# Altium PCB PLL_PCB.PcbDoc (part 1 of 3)
Units mil, origin at the board's own origin, x right, y up, seen from the top; angles counter-clockwise.
Board outline 5844 x 4441 mil, 4 copper layers (Top Layer, GND Layer, Power Layer, Bottom Layer), stack 22.156 mil thick; 143 components, 61 nets, 427 pads, 2616 vias.
Unrouted connection lines stored in the file: 5.
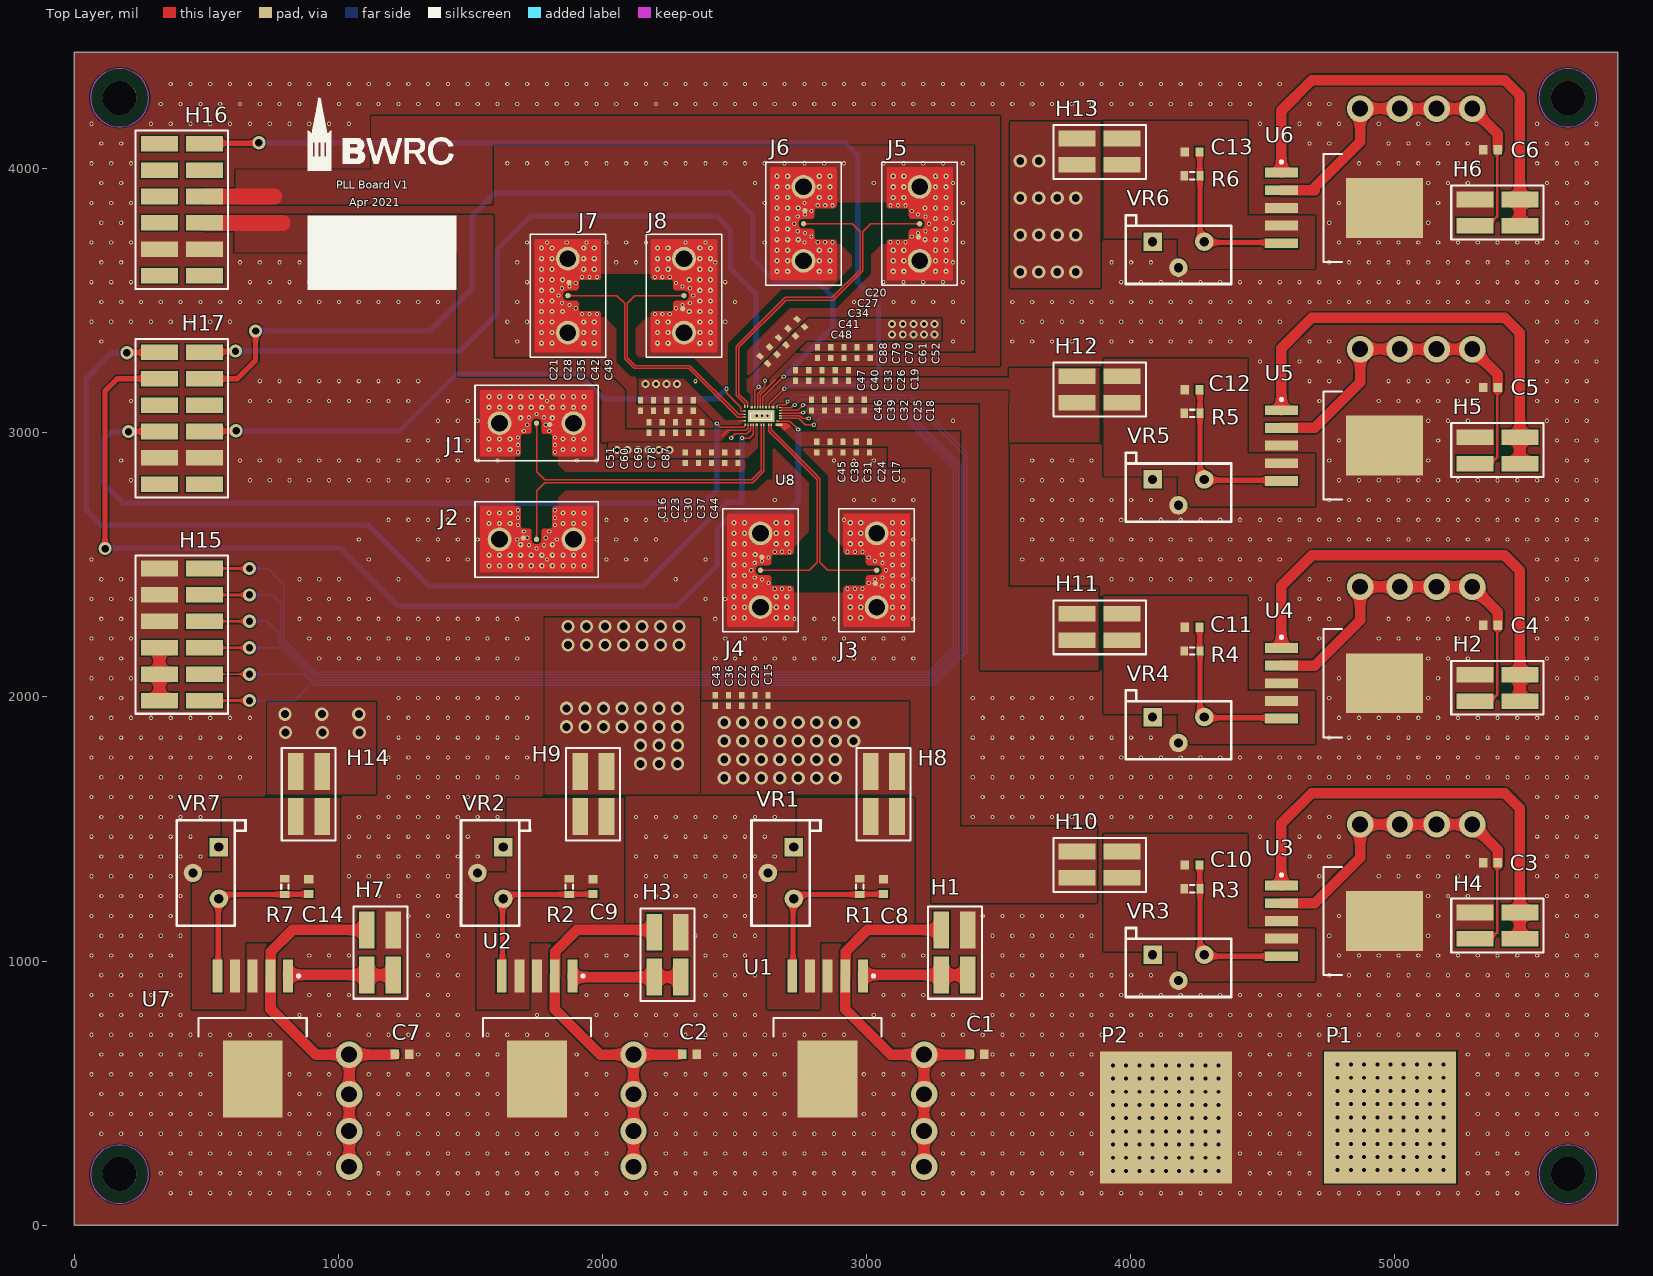
[diagram p0: Top Layer view]
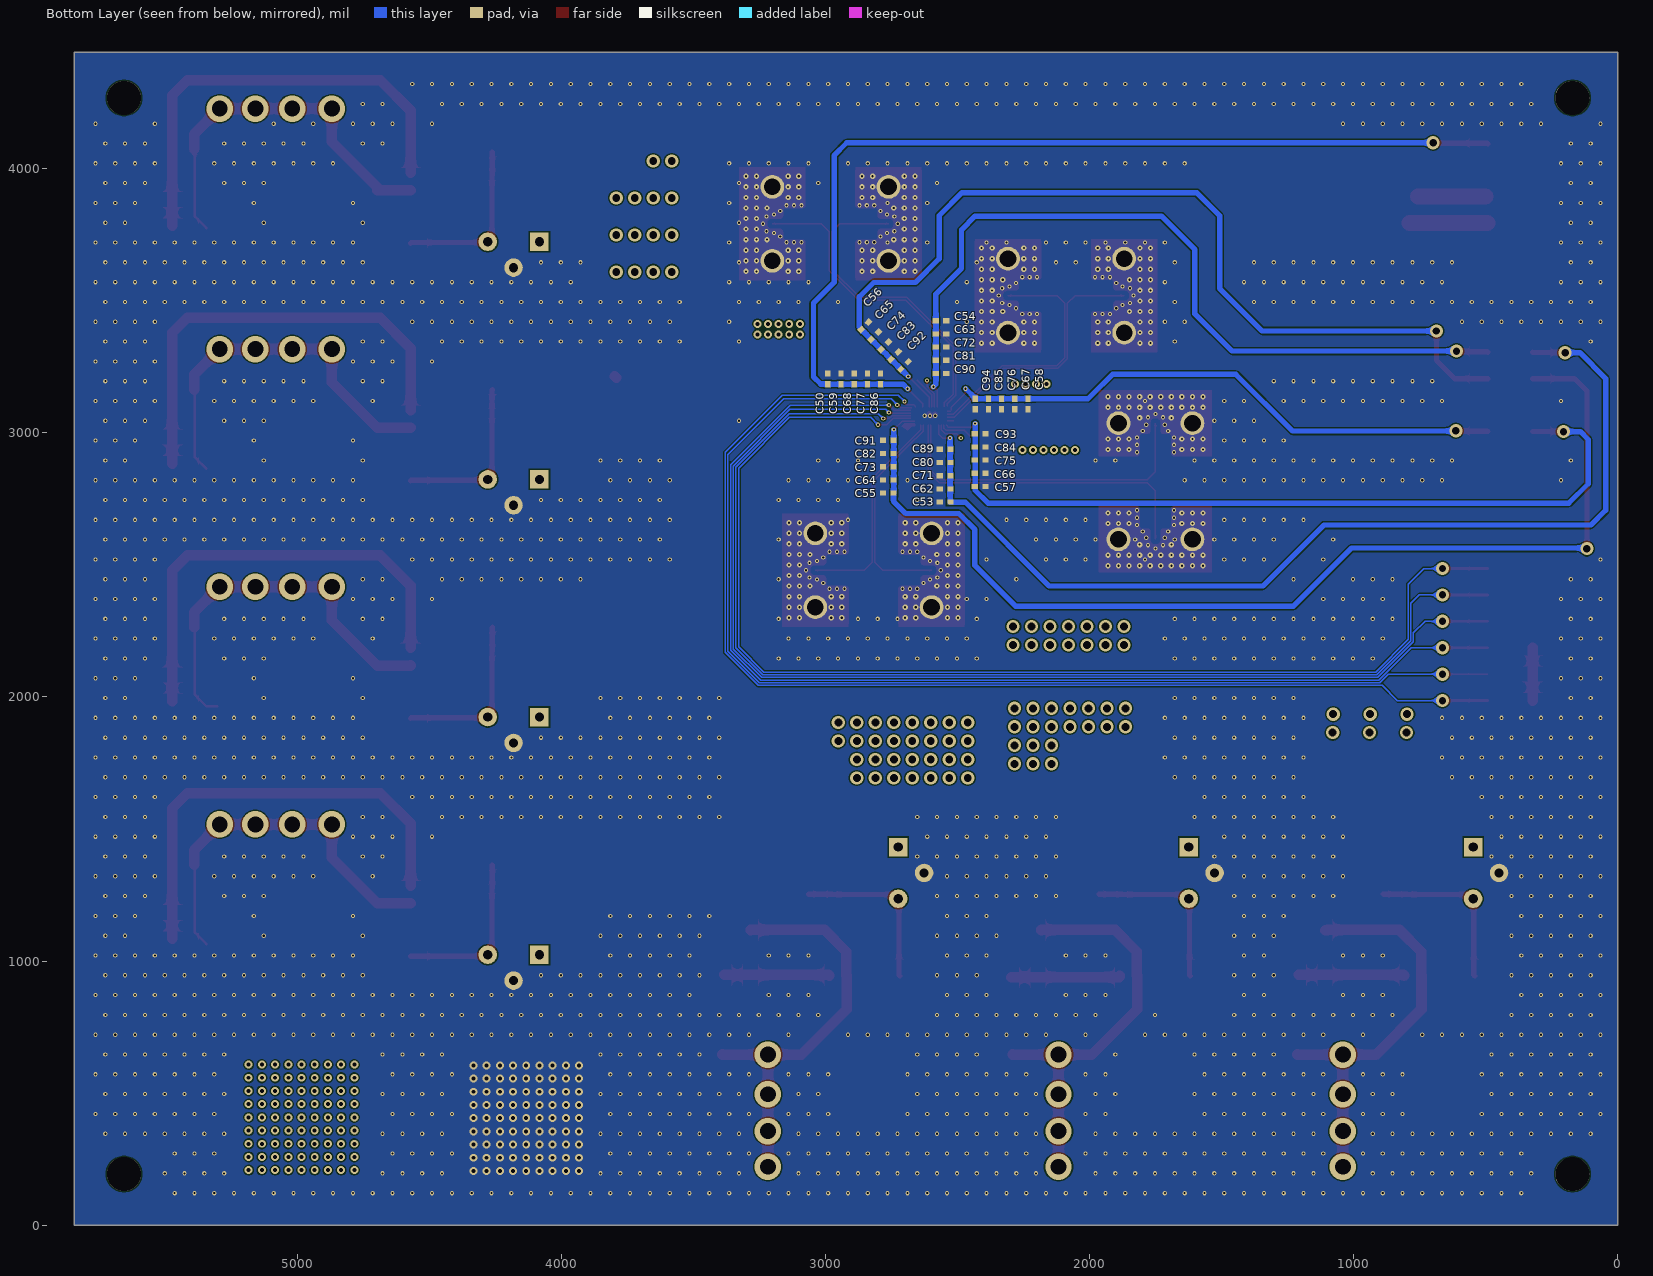
[diagram p1: Bottom Layer view, seen from below]
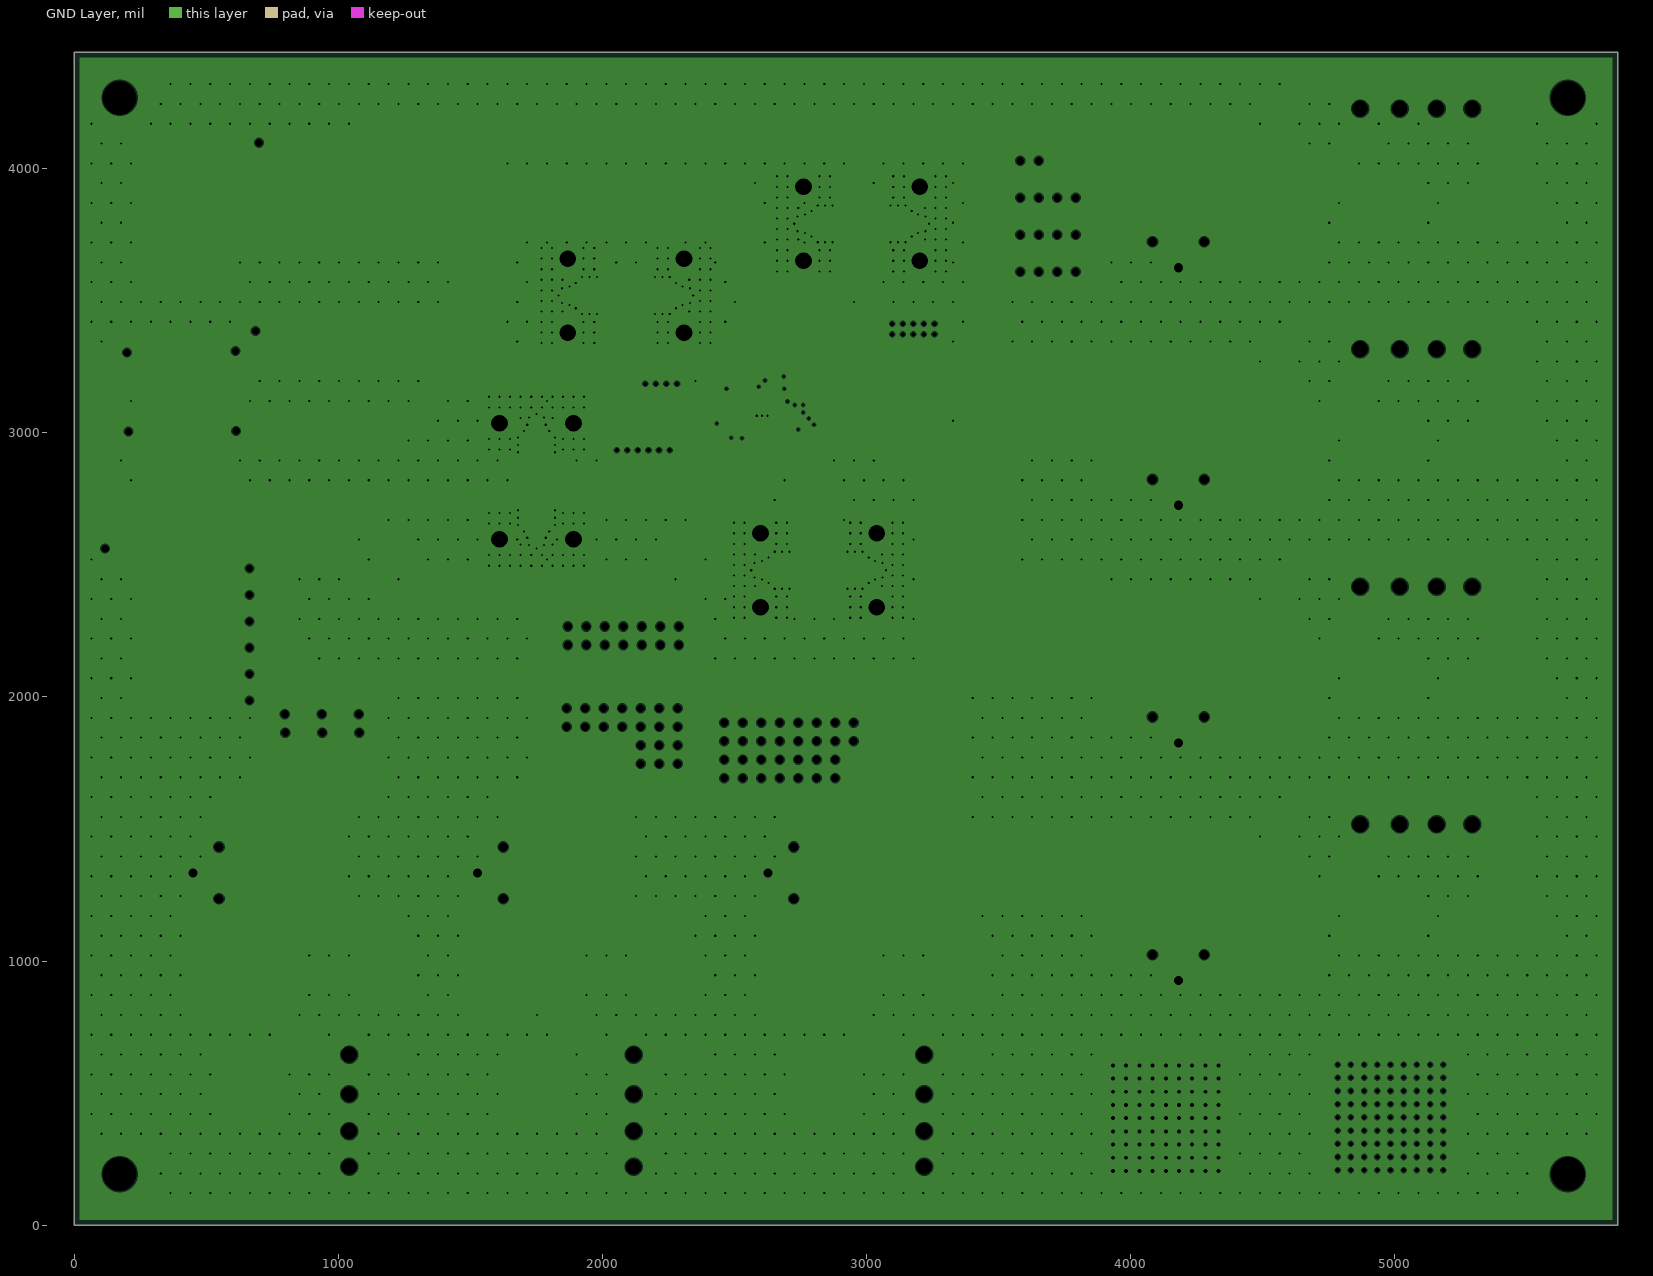
[diagram p2: GND Layer, clearances drawn from the general rule]
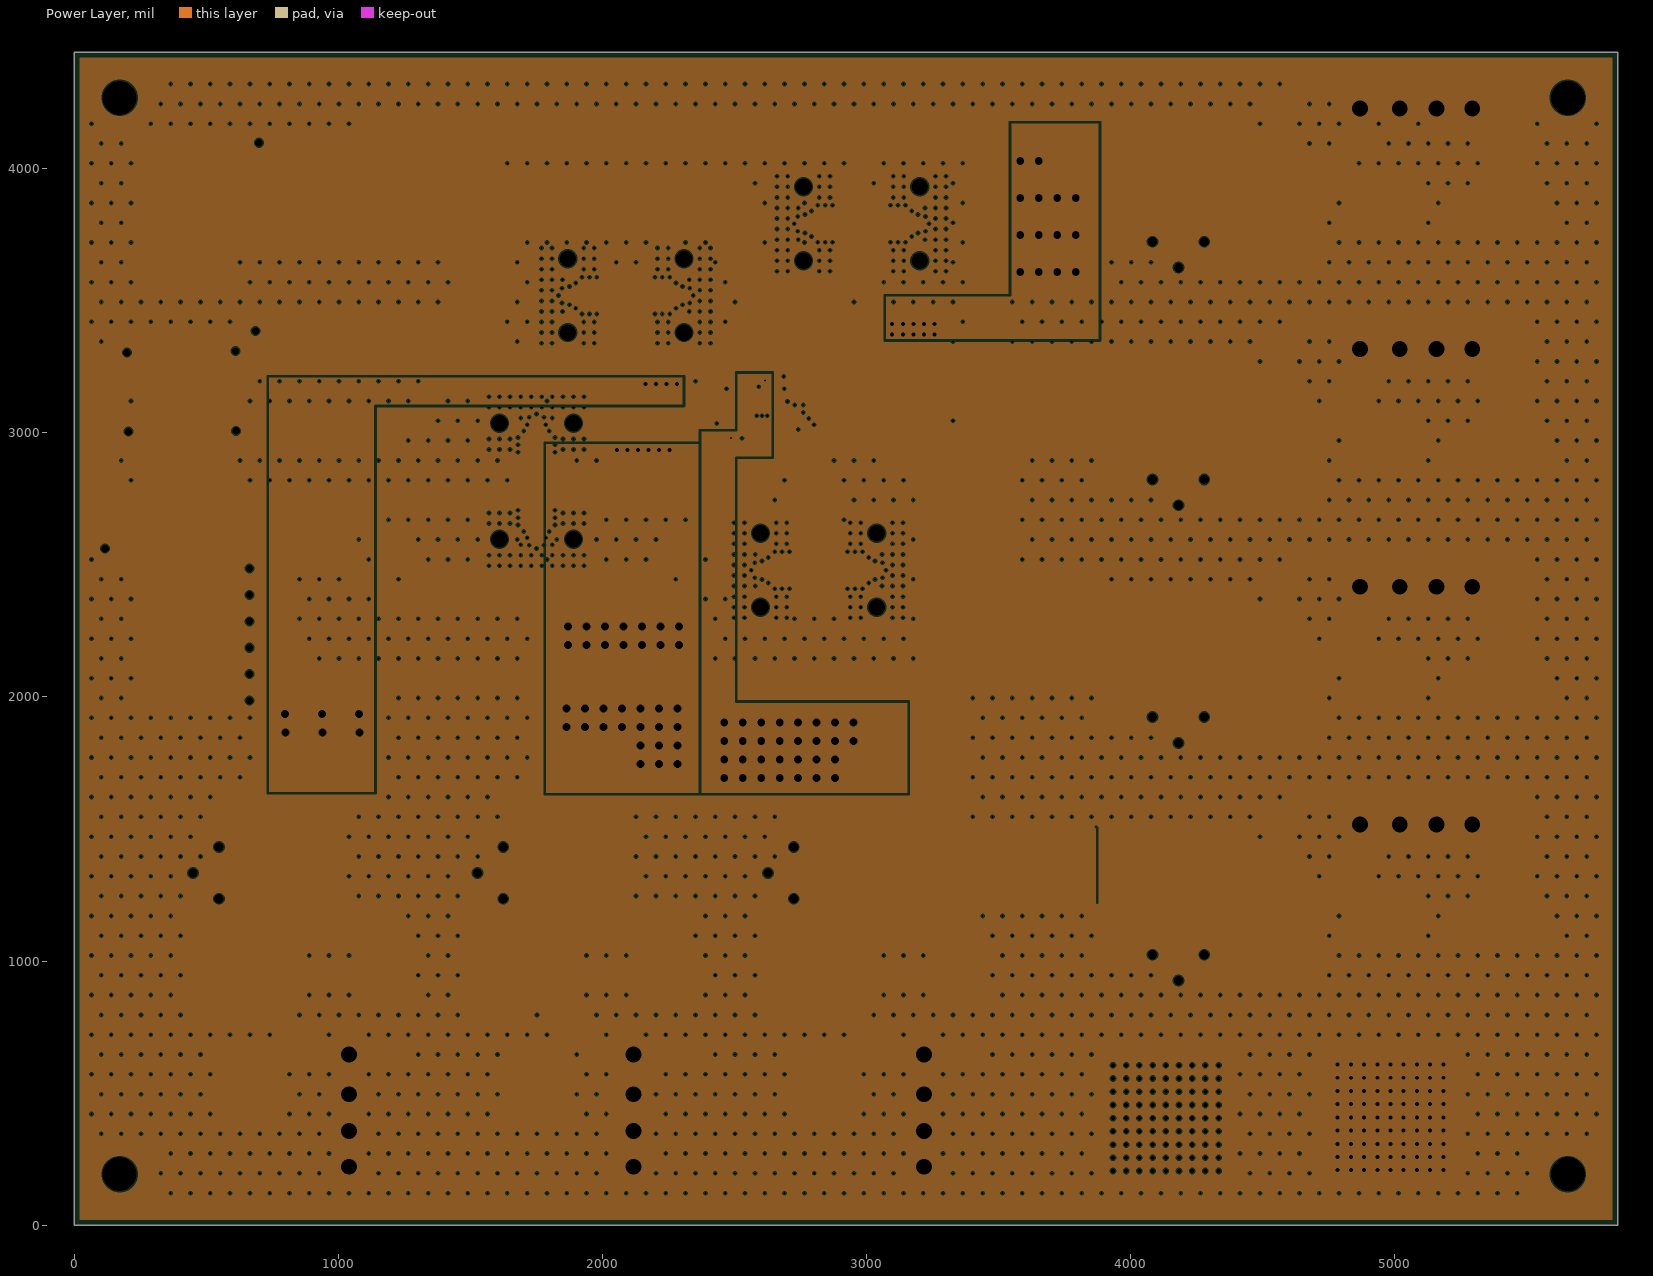
[diagram p3: Power Layer, clearances drawn from the general rule]

## Layer stack, top to bottom
Top Solder: solder mask 0.4, Solder Resist, Dk 3.5
Top Layer: signal copper 1.4
Dielectric 2: prepreg 2, PP-001, Dk 3.9
GND Layer: plane copper 1.378, net GND
Dielectric 1: dielectric 12.6, FR-4, Dk 4.8
Power Layer: plane copper 1.378, net (Multiple Nets)
Dielectric 3: prepreg 2, PP-001, Dk 3.9
Bottom Layer: signal copper 1.4
Bottom Solder: solder mask 0.4, Solder Resist, Dk 3.5

## Board outline
0,0 5844,0 5844,4441 0,4441

## Design rules (kind name [scope] priority, off if disabled: settings)
Clearance [All] p1: gap=5 ignorepadtopadclearanceinfootprint=FALSE
DiffPairsRouting [All] p1: maxlimit=10 minlimit=5 mostfreqgap=5 toplayer_minwidth=5 toplayer_maxwidth=15 toplayer_prefwidth=5 bottomlayer_minwidth=5 bottomlayer_maxwidth=15 bottomlayer_prefwidth=5 maxuncoupledlength=500
HoleSize [All] p1: absolutevalues=TRUE maxlimit=200 minlimit=8 maxpercent=80.000 minpercent=20.000
MinimumSolderMaskSliver [All] p1: minsoldermaskwidth=4
PlaneClearance [All] p1: clearance=5
PlaneConnect [All] p1: planeconnectstyle=Direct reliefexpansion=20 reliefentries=4 reliefconductorwidth=10 reliefairgap=10
PolygonConnect [All] p1: connectstyle=Direct reliefconductorwidth=10 reliefentries=4 polygonreliefangle="90 Angle" airgapwidth=10
RoutingVias [All] p1: holewidth=28 width=50 viastyle="Through Hole" minholewidth=8 minwidth=16 maxholewidth=150 maxwidth=300
SilkToSilkClearance [All] p1: silktosilkclearance=0
SilkToSolderMaskClearance [IsPad] p1: minsilkscreentomaskgap=0 clearancetoexposedcopper=TRUE
SolderMaskExpansion [All] p1: expansion=4 istentingtop=FALSE
Width [All] p1: maxlimit=60 minlimit=5 preferedwidth=20 minimp=50.000000 maximp=50.000000 favimp=50.000000
23 further rules are at their usual default settings.

## Classes and differential pairs
differential pair REF_CK: +REF_CK_P -REF_CK_N
differential pair REF2_CK: +REF2_CK_P -REF2_CK_N
differential pair PLL_CK: +PLL_CK_P -PLL_CK_N
differential pair PLL2_CK: +PLL2_CK_P -PLL2_CK_N

## Components (designator, comment, footprint, x,y, rotation, side; value= is the part's Value field where it differs from the comment)
C1 "Cap Semi" 1608[0603] 3418.28,647 r180 top value=10uF
C2 "Cap Semi" 1608[0603] 2329.64,647 r180 top value=10uF
C3 "Cap Semi" 1608[0603] 5362.34,1372 r0 top value=10uF
C4 "Cap Semi" 1608[0603] 5362.34,2272 r0 top value=10uF
C5 "Cap Semi" 1608[0603] 5362.34,3172 r0 top value=10uF
C6 "Cap Semi" 1608[0603] 5362.34,4072 r0 top value=10uF
C7 "Cap Semi" 1608[0603] 1241,647 r180 top value=10uF
C8 "Cap Semi" 1608[0603] 3064.28,1281.75 r90 top value=3.3nF
C9 "Cap Semi" 1608[0603] 1964,1281.75 r90 top value=3.3nF
C10 "Cap Semi" 1608[0603] 4232.9,1364 r180 top value=3.3nF
C11 "Cap Semi" 1608[0603] 4232.9,2264 r180 top value=3.3nF
C12 "Cap Semi" 1608[0603] 4232.9,3164 r180 top value=3.3nF
C13 "Cap Semi" 1608[0603] 4232.9,4064 r180 top value=3.3nF
C14 "Cap Semi" 1608[0603] 887,1281.75 r90 top value=3.3nF
C15 "Cap Semi" 0402 2627.05,1986.5 r270 top value=10uF
C16 "Cap Semi" 0402 2313.01,2906.31 r90 top value=10uF
C17 "Cap Semi" 0402 3011.01,2946.31 r90 top value=10uF
C18 "Cap Semi" 0402 2991.01,3105.31 r90 top value=10uF
C19 "Cap Semi" 0402 2931.17,3217.67 r270 top value=10uF
C20 "Cap Semi" 0402 2751.15,3416.45 r315 top value=10uF
C21 "Cap Semi" 0402 2143.33,3103.86 r90 top value=10uF
C22 "Cap Semi" 0402 2527.05,1986.5 r270 top value=1uF
C23 "Cap Semi" 0402 2363.01,2906.31 r90 top value=1uF
C24 "Cap Semi" 0402 2961.01,2946.31 r90 top value=1uF
C25 "Cap Semi" 0402 2941.01,3105.31 r90 top value=1uF
C26 "Cap Semi" 0402 2881.17,3217.67 r270 top value=1uF
C27 "Cap Semi" 0402 2716.15,3381.45 r315 top value=1uF
C28 "Cap Semi" 0402 2193.33,3103.86 r90 top value=1uF
C29 "Cap Semi" 0402 2577.05,1986.5 r270 top value=100nF
C30 "Cap Semi" 0402 2413.01,2906.31 r90 top value=100nF
C31 "Cap Semi" 0402 2911.01,2946.31 r90 top value=100nF
C32 "Cap Semi" 0402 2891.01,3105.31 r90 top value=100nF
C33 "Cap Semi" 0402 2831.17,3217.67 r270 top value=100nF
C34 "Cap Semi" 0402 2681.15,3346.45 r315 top value=100nF
C35 "Cap Semi" 0402 2243.33,3103.86 r90 top value=100nF
C36 "Cap Semi" 0402 2477.05,1986.5 r270 top value=10nF
C37 "Cap Semi" 0402 2463.01,2906.31 r90 top value=10nF
C38 "Cap Semi" 0402 2861.01,2946.31 r90 top value=10nF
C39 "Cap Semi" 0402 2841.01,3105.31 r90 top value=10nF
C40 "Cap Semi" 0402 2781.17,3217.67 r270 top value=10nF
C41 "Cap Semi" 0402 2646.15,3311.45 r315 top value=10nF
C42 "Cap Semi" 0402 2293.33,3103.86 r90 top value=10nF
C43 "Cap Semi" 0402 2427.05,1986.5 r270 top value=1nF
C44 "Cap Semi" 0402 2513.01,2906.31 r90 top value=1nF
C45 "Cap Semi" 0402 2811.01,2946.31 r90 top value=1nF
C46 "Cap Semi" 0402 2791.01,3105.31 r90 top value=1nF
C47 "Cap Semi" 0402 2731.17,3217.67 r270 top value=1nF
C48 "Cap Semi" 0402 2611.15,3276.45 r315 top value=1nF
C49 "Cap Semi" 0402 2343.33,3103.86 r90 top value=1nF
C50 "Cap Semi" 0402 2991,3204.69 r270 bottom value=10uF
C51 "Cap Semi" 0402 2176.35,3020.29 r270 top value=10uF
C52 "Cap Semi" 0402 3014.2,3304.27 r270 top value=10uF
C53 "Cap Semi" 0402 2546.69,2738 r180 bottom value=10uF
C54 "Cap Semi" 0402 2562,3425 r0 bottom value=10uF
C55 "Cap Semi" 0402 2761.69,2772 r180 bottom value=10uF
C56 "Cap Semi" 0402 2850.53,3405.39 r315 bottom value=10uF
C57 "Cap Semi" 0402 2414,2797 r0 bottom value=10uF
C58 "Cap Semi" 0402 2232.58,3109.87 r90 bottom value=10uF
C59 "Cap Semi" 0402 2941,3204.69 r270 bottom value=1uF
C60 "Cap Semi" 0402 2226.35,3020.29 r270 top value=1uF
C61 "Cap Semi" 0402 2964.2,3304.27 r270 top value=1uF
C62 "Cap Semi" 0402 2546.69,2788 r180 bottom value=1uF
C63 "Cap Semi" 0402 2562,3375 r0 bottom value=1uF
C64 "Cap Semi" 0402 2761.69,2822 r180 bottom value=1uF
C65 "Cap Semi" 0402 2813.03,3367.89 r315 bottom value=1uF
C66 "Cap Semi" 0402 2414,2847 r0 bottom value=1uF
C67 "Cap Semi" 0402 2282.58,3109.87 r90 bottom value=1uF
C68 "Cap Semi" 0402 2891,3204.69 r270 bottom value=100nF
C69 "Cap Semi" 0402 2276.35,3020.29 r270 top value=100nF
C70 "Cap Semi" 0402 2914.2,3304.27 r270 top value=100nF
C71 "Cap Semi" 0402 2546.69,2838 r180 bottom value=100nF
C72 "Cap Semi" 0402 2562,3325 r0 bottom value=100nF
C73 "Cap Semi" 0402 2761.69,2872 r180 bottom value=100nF
C74 "Cap Semi" 0402 2775.53,3330.39 r315 bottom value=100nF
C75 "Cap Semi" 0402 2414,2897 r0 bottom value=100nF
C76 "Cap Semi" 0402 2332.58,3109.87 r90 bottom value=100nF
C77 "Cap Semi" 0402 2841,3204.69 r270 bottom value=10nF
C78 "Cap Semi" 0402 2326.35,3020.29 r270 top value=10nF
C79 "Cap Semi" 0402 2864.2,3304.27 r270 top value=10nF
C80 "Cap Semi" 0402 2546.69,2888 r180 bottom value=10nF
C81 "Cap Semi" 0402 2562,3275 r0 bottom value=10nF
C82 "Cap Semi" 0402 2761.69,2922 r180 bottom value=10nF
C83 "Cap Semi" 0402 2738.03,3292.89 r315 bottom value=10nF
C84 "Cap Semi" 0402 2414,2947 r0 bottom value=10nF
C85 "Cap Semi" 0402 2382.58,3109.87 r90 bottom value=10nF
C86 "Cap Semi" 0402 2791,3204.69 r270 bottom value=1nF
C87 "Cap Semi" 0402 2376.35,3020.29 r270 top value=1nF
C88 "Cap Semi" 0402 2814.2,3304.27 r270 top value=1nF
C89 "Cap Semi" 0402 2546.69,2938 r180 bottom value=1nF
C90 "Cap Semi" 0402 2562,3225 r0 bottom value=1nF
C91 "Cap Semi" 0402 2761.69,2972 r180 bottom value=1nF
C92 "Cap Semi" 0402 2700.53,3255.39 r315 bottom value=1nF
C93 "Cap Semi" 0402 2414,2997 r0 bottom value=1nF
C94 "Cap Semi" 0402 2432.58,3109.87 r90 bottom value=1nF
H1 "HEADER_2X2_SMT" HEADER_2X2_SMT 3333.28,1032.31 r270 top
H2 "HEADER_2X2_SMT" HEADER_2X2_SMT 5389,2034 r0 top
H3 "HEADER_2X2_SMT" HEADER_2X2_SMT 2245.47,1024 r270 top
H4 "HEADER_2X2_SMT" HEADER_2X2_SMT 5389,1134 r0 top
H5 "HEADER_2X2_SMT" HEADER_2X2_SMT 5389,2934 r0 top
H6 "HEADER_2X2_SMT" HEADER_2X2_SMT 5389,3834 r0 top
H7 "HEADER_2X2_SMT" HEADER_2X2_SMT 1157.67,1032.31 r270 top
H8 "HEADER_2X2_SMT" HEADER_2X2_SMT 3065.28,1632.31 r90 top
H9 "HEADER_2X2_SMT" HEADER_2X2_SMT 1965,1632.31 r90 top
H10 "HEADER_2X2_SMT" HEADER_2X2_SMT 3882.35,1365 r180 top
H11 "HEADER_2X2_SMT" HEADER_2X2_SMT 3882.34,2265 r180 top
H12 "HEADER_2X2_SMT" HEADER_2X2_SMT 3882.34,3165 r180 top
H13 "HEADER_2X2_SMT" HEADER_2X2_SMT 3882.34,4065 r180 top
H14 "HEADER_2X2_SMT" HEADER_2X2_SMT 888,1632.31 r90 top
H15 "HEADER_2X6_SMT" HDR2X6_SMT 407,2236.47 r0 top
H16 "HEADER_2X6_SMT" HDR2X6_SMT 407,3845.55 r0 top
H17 "HEADER_2X6_SMT" HDR2X6_SMT 407,3055.55 r0 top
J1 "CON_K_SMT_2d92" CON_K_SMT_2D92 1750,3037 r270 top
J2 "CON_K_SMT_2d92" CON_K_SMT_2D92 1750,2597 r90 top
J3 "CON_K_SMT_2d92" CON_K_SMT_2D92 3038.01,2480 r180 top
J4 "CON_K_SMT_2d92" CON_K_SMT_2D92 2598.01,2480 r0 top
J5 "CON_K_SMT_2d92" CON_K_SMT_2D92 3201,3792 r180 top
J6 "CON_K_SMT_2d92" CON_K_SMT_2D92 2761,3792 r0 top
J7 "CON_K_SMT_2d92" CON_K_SMT_2D92 1868.5,3520 r0 top
J8 "CON_K_SMT_2d92" CON_K_SMT_2D92 2308.5,3520 r180 top
P1 "BANANA_JACK_SMT" BANANA_JACK_SMT 4983,407 r0 top
P2 "BANANA_JACK_SMT" BANANA_JACK_SMT 4133,407 r0 top
R1 "Res3" J1-0603 2974.28,1281.75 r90 top value=1.4K
R2 "Res3" J1-0603 1874,1281.75 r90 top value=1.4K
R3 "Res3" J1-0603 4232.9,1274 r180 top value=1.4K
R4 "Res3" J1-0603 4232.9,2174 r180 top value=1.4K
R5 "Res3" J1-0603 4232.9,3074 r180 top value=1.4K
R6 "Res3" J1-0603 4232.9,3974 r180 top value=1.4K
R7 "Res3" J1-0603 797,1281.75 r90 top value=1.4K
U1 "LP38511TJ-ADJ" TJ5A_N 2852.28,707.31 r270 top
U2 "LP38511TJ-ADJ" TJ5A_N 1752,707.31 r270 top
U3 "LP38511TJ-ADJ" TJ5A_N 4807.34,1152 r0 top
U4 "LP38511TJ-ADJ" TJ5A_N 4807.34,2052 r0 top
U5 "LP38511TJ-ADJ" TJ5A_N 4807.34,2952 r0 top
U6 "LP38511TJ-ADJ" TJ5A_N 4807.34,3852 r0 top
U7 "LP38511TJ-ADJ" TJ5A_N 675,707.31 r270 top
U8 "PLL_CHIP" PLL_CHIP 2601.01,3064.04 r0 top
VR1 "5K" PV36 2724.28,1333.75 r180 top
VR2 "5K" PV36 1624,1333.75 r180 top
VR3 "5K" PV36 4180.9,1024 r270 top
VR4 "5K" PV36 4180.9,1924 r270 top
VR5 "5K" PV36 4180.9,2824 r270 top
VR6 "5K" PV36 4180.9,3724 r270 top
VR7 "5K" PV36 547,1333.75 r180 top

## Footprints (in the part's own frame and the unit in brackets; to place one, negate y for a bottom-side part, rotate by r counter-clockwise, add the part's x,y. Pads: shape width x height; smd on the part's side, far side on the other; paste and mask are expansions set on the pad)
0402 [mm] "Chip Capacitor, Body 1.0x0.5mm, IPC High Density"
  rect 0.6x0.5 smd: 1(-0.508,0) 2(0.508,0)
  body extent -0.55,-0.3 0.55,0.3, height 1.3
1608[0603] [mm] "Chip Capacitor, Body 1.6x0.8mm, IPC High Density"
  rect 0.8x0.9 smd: 1(-0.7,0) 2(0.7,0)
  body extent -0.87,-0.48 0.87,0.48, height 1.3
BANANA_JACK_SMT [mil]
  rect 500x500 smd: 1(0,0)
CON_K_SMT_2D92 [mil]
  round 90 hole 63: 1(0,140) 4(0,-140)
  round 19.68 smd paste-9.84 mask+9.84: 2(5,50)
  round 20 smd paste-10: 3(0,0)
  Top Layer region: -125.51,-215 125.51,-215 125.51,-195 -125.51,-195
  Top Layer region: -125.51,195 125.51,195 125.51,215 -125.51,215
  Top Layer region: -125.51,-205 -125.46,-205.22 -125.32,-205.4 -125.11,-205.5 -124.89,-205.5 -124.68,-205.4 -124.54,-205.22 -124.49,-205 -124.49,-205 -124.49,-0.51 -20.51,-0.51 -17.59,-10.55 -10.11,-17.85 0,-20.51 0,-20.51 0.2,-20.48 0.36,-20.36 0.48,-20.2 0.51,-20 0.51,-20 0.48,-19.8 0.36,-19.64 0.2,-19.52 0,-19.49 0,-19.49 -7.46,-18 -13.78,-13.78 -18,-7.46 -19.49,0 -19.49,0 -18,7.46 -13.78,13.78 -7.46,18 0,19.49 0,19.49 30,19.49 34.02,20.29 37.44,22.56 39.71,25.98 40.51,30 40.51,30 40.51,50 41.24,53.63 43.29,56.71 46.37,58.76 50,59.49 50,59.49 115,59.49 119.02,60.29 122.44,62.56 124.71,65.98 125.51,70 125.51,70 125.51,205 125.48,205.2 125.36,205.36 125.2,205.48 125,205.51 125,205.51 -125,205.51 -125.2,205.48 -125.36,205.36 -125.48,205.2 -125.51,205 -125.51,205
  Top Layer region: -125,-205.51 -125.2,-205.48 -125.36,-205.36 -125.48,-205.2 -125.51,-205 -125.51,-205 -125.51,205 -125.46,205.22 -125.32,205.4 -125.11,205.5 -124.89,205.5 -124.68,205.4 -124.54,205.22 -124.49,205 -124.49,205 -124.49,0.51 -20.51,0.51 -17.59,10.55 -10.11,17.85 0,20.51 0,20.51 0.2,20.48 0.36,20.36 0.48,20.2 0.51,20 0.51,20 0.48,19.8 0.36,19.64 0.2,19.52 0,19.49 0,19.49 -7.46,18 -13.78,13.78 -18,7.46 -19.49,0 -19.49,0 -18,-7.46 -13.78,-13.78 -7.46,-18 0,-19.49 0,-19.49 30,-19.49 34.02,-20.29 37.44,-22.56 39.71,-25.98 40.51,-30 40.51,-30 40.49,-30.15 40.43,-30.29 40.43,-30.29 40.49,-30.42 40.51,-30.58 40.51,-30.58 40.51,-50 41.24,-53.63 43.29,-56.71 46.37,-58.76 50,-59.49 50,-59.49 115,-59.49 119.02,-60.29 122.44,-62.56 124.71,-65.98 125.51,-70 125.51,-70 125.51,-205 125.48,-205.2 125.36,-205.36 125.2,-205.48 125,-205.51 125,-205.51
  silkscreen extent -143,-233 143,233
HDR2X6_SMT [mil]
  rect 140x59.06 smd: 1(-85,250) 2(-85,150) 3(-85,50) 4(-85,-50) 5(-85,-150) 6(-85,-250) 7(85,250) 8(85,150) 9(85,50) 10(85,-50) 11(85,-150) 12(85,-250)
  silkscreen extent -175,-300 175,300
HEADER_2X2_SMT [mil]
  rect 140x59.06 smd: 1(-85,50) 2(85,50) 3(-85,-50) 4(85,-50)
  silkscreen extent -175,-101 175,103
J1-0603 [mm] "Chip Resistor, Body 1.6x0.8mm, IPC High Density"
  rect 0.7x0.9 smd: 1(-0.75,0) 2(0.75,0)
  silkscreen extent -0.2,-0.35 0.2,0.35, body extent -0.85,-0.48 0.85,0.48, height 0.9
PLL_CHIP [mil]
  rect 100x45 smd paste-100 mask+2: 1(0,0)
  rect 5x10 smd paste-100 mask+2: 2(-62,36) 3(-52,36) 5(-24,33) 6(-14,33) 7(-4,33) 8(6,33) 10(30,33) 12(59.5,34) 20(38,-33) 21(28,-33) 22(10,-33) 23(0,-33) 25(-30,-33) 26(-40,-33) 27(-50,-33) 28(-60,-33)
  rect 8x10 smd paste-100 mask+2: 4(-36,33) 9(18,33)
  rect 12x10 smd paste-100 mask+2: 11(45,33)
  rect 10x5 smd paste-100 mask+2: 13(72,32) 14(72,21) 15(72,11) 16(72,1) 17(72,-9) 18(61,-19) 29(-62,-18) 30(-62,-4) 31(-62,6) 32(-62,19)
  rect 26x10 smd paste-100 mask+2: 19(67,-33)
  rect 10x10 smd paste-100 mask+2: 24(-17.5,-33)
  Top Layer pour cut-out: -57,28 -57,-28 67,-28 67,28
  silkscreen extent -40,-12 40,12
PV36 [mil]
  rect 70x70 hole 35: 1(0,-98)
  round 70 hole 35: 2(98,0) 3(0,98)
  silkscreen extent -101,-200 160,200
TJ5A_N [mm] "D2-PAK, 6-Leads, Body 9.9x10.2mm, Pitch 1.7mm, Lead Span 14mm, IPC Medium Density"
  rect 3.2x0.95 smd: 1(-6,3.4) 2(-6,1.7) 3(-6,0) 4(-6,-1.7) 5(-6,-3.4)
  rect 7.4x5.75 smd: 6(3.9,0)
  silkscreen extent -6.12,-5.2 -0.2,5.2, body extent -1.95,-5.2 8.15,5.2, height 2.1

## Part data
C1 C2 C3 C4 C5 C6 C7 C8 C9 C10 C11 C12 C13 C14 C15 C16 C17 C18 C19 C20 C21 C22 C23 C24 C25 C26 C27 C28 C29 C30 C31 C32 C33 C34 C35 C36 C37 C38 C39 C40 C41 C42 C43 C44 C45 C46 C47 C48 C49 C50 C51 C52 C53 C54 C55 C56 C57 C58 C59 C60 C61 C62 C63 C64 C65 C66 C67 C68 C69 C70 C71 C72 C73 C74 C75 C76 C77 C78 C79 C80 C81 C82 C83 C84 C85 C86 C87 C88 C89 C90 C91 C92 C93 C94: "Capacitor (Semiconductor SIM Model)", LatestRevisionDate=29-May-2009, LatestRevisionNote="IPC-7351 Footprint Added.", PackageDescription="Chip Capacitor", PackageReference=C1206, Published=8-Jun-2000, Publisher="Altium Limited"
J1 J2 J3 J4 J5 J6 J7 J8: "Con RF K"
R1 R2 R3 R4 R5 R6 R7: "Resistor", LatestRevisionDate=29-May-2009, LatestRevisionNote="IPC-7351 Footprint Added.", PackageDescription="Chip Resistor", PackageReference=J1-0603, Published=8-Jun-2000, Publisher="Altium Limited"
U1 U2 U3 U4 U5 U6 U7: "800 mA Fast-Transient Response Low-Dropout Linear Voltage Regulator with Error Flag, 6-pin TO-263 Thin", Manufacturer="National Semiconductor", PackageTopMarking=NSUZXYTTE#*LP38511*TJ-ADJ, PowerWise=N, ComponentLink1Description="Manufacturer URL", ComponentLink1URL=http://www.national.com/, ComponentLink2Description="LP38511 Datasheet", ComponentLink2URL=http://www.national.com/ds/LP/LP38511-ADJ.pdf, ComponentLink3Description="LP38511 Web Page", ComponentLink3URL=http://www.national.com/pf/LP/LP38511.html, ComponentLink4Description="TJ5A Package Page", ComponentLink4URL=http://www.national.com/packaging/folders/tj5a.html, CompType="LDO IC", DatasheetVersion=Feb-2009, High-Reliability=Y, PackageDescription="Thin TO-263, Molded, 9.85 x 10.16 x 2mm Body, 5 Lead, 1.7mm Pitch, Surface Mount", PackageReference=TJ5A, PackageVersion="revE, Jan-2008", PartNumber=LP38511TJ-ADJ, PinCount=5, RoHS=Y
VR1 VR2 VR3 VR4 VR5 VR6 VR7: library part RPot_5K, "Potentiometer", Manufacturer=Bourns, Manufacturer ID=3214X-1-502E, Digikey ID=3214X-1-502ECT-ND

## Free pads (board coordinates)
  round 128.35 hole 128.5 unplated: 0(171,193) 0(171,4269) 0(5656,193) 0(5656,4269)

## Via types
v1: diameter 16, hole 8, Top Layer to Bottom Layer, tented both sides, 2037 vias
v2: diameter 20, hole 8, Top Layer to Bottom Layer, tented both sides, 272 vias
v3: diameter 30, hole 15, Top Layer to Bottom Layer, tented both sides, 182 vias
v4: diameter 50, hole 30, Top Layer to Bottom Layer, tented both sides, 84 vias
v5: diameter 100, hole 60, Top Layer to Bottom Layer, tented both sides, 28 vias
v6: diameter 50, hole 28, Top Layer to Bottom Layer, tented both sides, 13 vias

## Nets (pads, with @x,y where several pads share a name; then routed paths per layer and width w, separated by ;. In a path a pad name is that pad's centre, name@x,y a point inside that pad or via, vN(x,y) a via of type N, cw(c..) or ccw(c..) an arc to the next point about the centre after c; other vN are vias at no path point)
BUF_IREF: C55.2 C64.2 C73.2 C82.2 C91.2 H17.2 U8.18 | length 4138.3
  Top Layer w5: U8.18@2662.01,3045.04 2708.91,3045.04 v1(2740.86,3013.09) v1@2743.42,3010.53
  Top Layer w20: v6(116,2562) 116,3158.69 162.86,3205.55 H17.2@322,3205.55
  Bottom Layer w20: v6@129.09,2564 1007,2564 1227,2344 2280.34,2344 2434,2497.66 2434,2634 2495,2695 2696,2695 2742,2741 C55.2@2742,2772 ; v1(2740.86,3013.09) 2740.86,2972 2740.86,2922 2740.86,2872 2740.86,2822 2740.86,2772.16 C55.2@2741.02,2772
BUF_IREF2: C56.2 C65.2 C74.2 C83.2 C92.2 H17.8 U8.8 | length 3687
  Top Layer w5: U8.8@2607.01,3097.04 2607.01,3135.5 2685.44,3213.93 v1(2686.1,3213.93)
  Top Layer w20: H17.8@492,3205.55 617.55,3205.55 686,3274 v6(686,3386)
  Bottom Layer w20: v6(686,3386) 1346,3386 1507,3547 1507,3823 1594,3910 2482,3910 2569,3823 2569,3660 2659,3570 2817,3570 2871.41,3515.59 2871.41,3410.75 2871.33,3410.68 2871.33,3400.92 2863.28,3392.86 2863.28,3392.64 C56.2@2864.1,3391.82 ; v1(2686.1,3213.93) 2863.25,3391.08 2863.36,3391.08 C56.2@2864.1,3391.82 ; C56.2@2864.45,3391.47 C56.2@2864.1,3391.82
DVDD: C15.2 C22.2 C29.2 C36.2 C43.2 H8.2 H8.4 U8.6 U8.26 | length 219.2
  Top Layer w5: v1(2487.01,2981.31) 2503.01,2997.31 2546.51,2997.31 2561.01,3011.81 U8.26@2561.01,3031.04 ; U8.6@2587.01,3097.04 2587.01,3148.84 2615.01,3176.84 v1(2615.01,3198.81)
  other v4: 2461,1693 2531,1693 2601,1693 2671,1693 2741,1693 2811,1693 2881,1693 2461,1763 2531,1763 2601,1763 2671,1763 2741,1763 2811,1763 2881,1763 2461,1833 2531,1833 2601,1833 2671,1833 2741,1833 2811,1833 2881,1833 2951,1833 2461,1903 2531,1903 2601,1903 2671,1903 2741,1903 2811,1903 2881,1903 2951,1903
DVDD_M: C8.2 H8.1 H8.3 R1.2 U1.4
EN_DVDD: H1.2 H1.4 U1.1 | length 400.2
  Top Layer w40: U1.1@2986.14,943.53 2986.14,946.01 2987.44,947.31 H1.4@3283.28,947.31 H1.2@3383.28,947.31
EN_VDD_BUF: H4.2 H4.4 U3.1 | length 1704.3
  Top Layer w40: U3.1@4571.12,1285.86 4571.12,1521.12 4686,1636 5417,1636 5474,1579 H4.2@5474,1184 H4.4@5474,1084
EN_VDD_BUF2: H7.2 H7.4 U7.1 | length 401.8
  Top Layer w40: U7.1@808.86,943.53 808.86,946.01 810.16,947.31 H7.4@1107.67,947.31 H7.2@1207.67,947.31
EN_VDD_LDO: H2.2 H2.4 U4.1 | length 1704.3
  Top Layer w40: U4.1@4571.12,2185.86 4571.12,2421.12 4686,2536 5417,2536 5474,2479 H2.2@5474,2084 H2.4@5474,1984
EN_VDD_PD: H3.2 H3.4 U2.1 | length 413.4
  Top Layer w40: U2.1@1885.86,943.53 1885.86,940.3 1887.16,939 H3.4@2195.47,939 H3.2@2295.47,939
EN_VDD_PD2: H6.2 H6.4 U6.1 | length 1704.3
  Top Layer w40: U6.1@4571.12,3985.86 4571.12,4221.12 4686,4336 5417,4336 5474,4279 H6.2@5474,3884 H6.4@5474,3784
EN_VDD_VCO: H5.2 H5.4 U5.1 | length 1704.3
  Top Layer w40: U5.1@4571.12,3085.86 4571.12,3321.12 4686,3436 5417,3436 5474,3379 H5.2@5474,2984 H5.4@5474,2884